# Altium PCB Arduino Micro Breakout Board_V1.0.pcbdoc
Units mil, origin at the board's own origin, x right, y up, seen from the top; angles counter-clockwise.
Board outline 3144.33 x 3144.48 mil, 2 copper layers (Top Layer, Bottom Layer); 42 components, 47 nets, 174 pads, 40 vias.
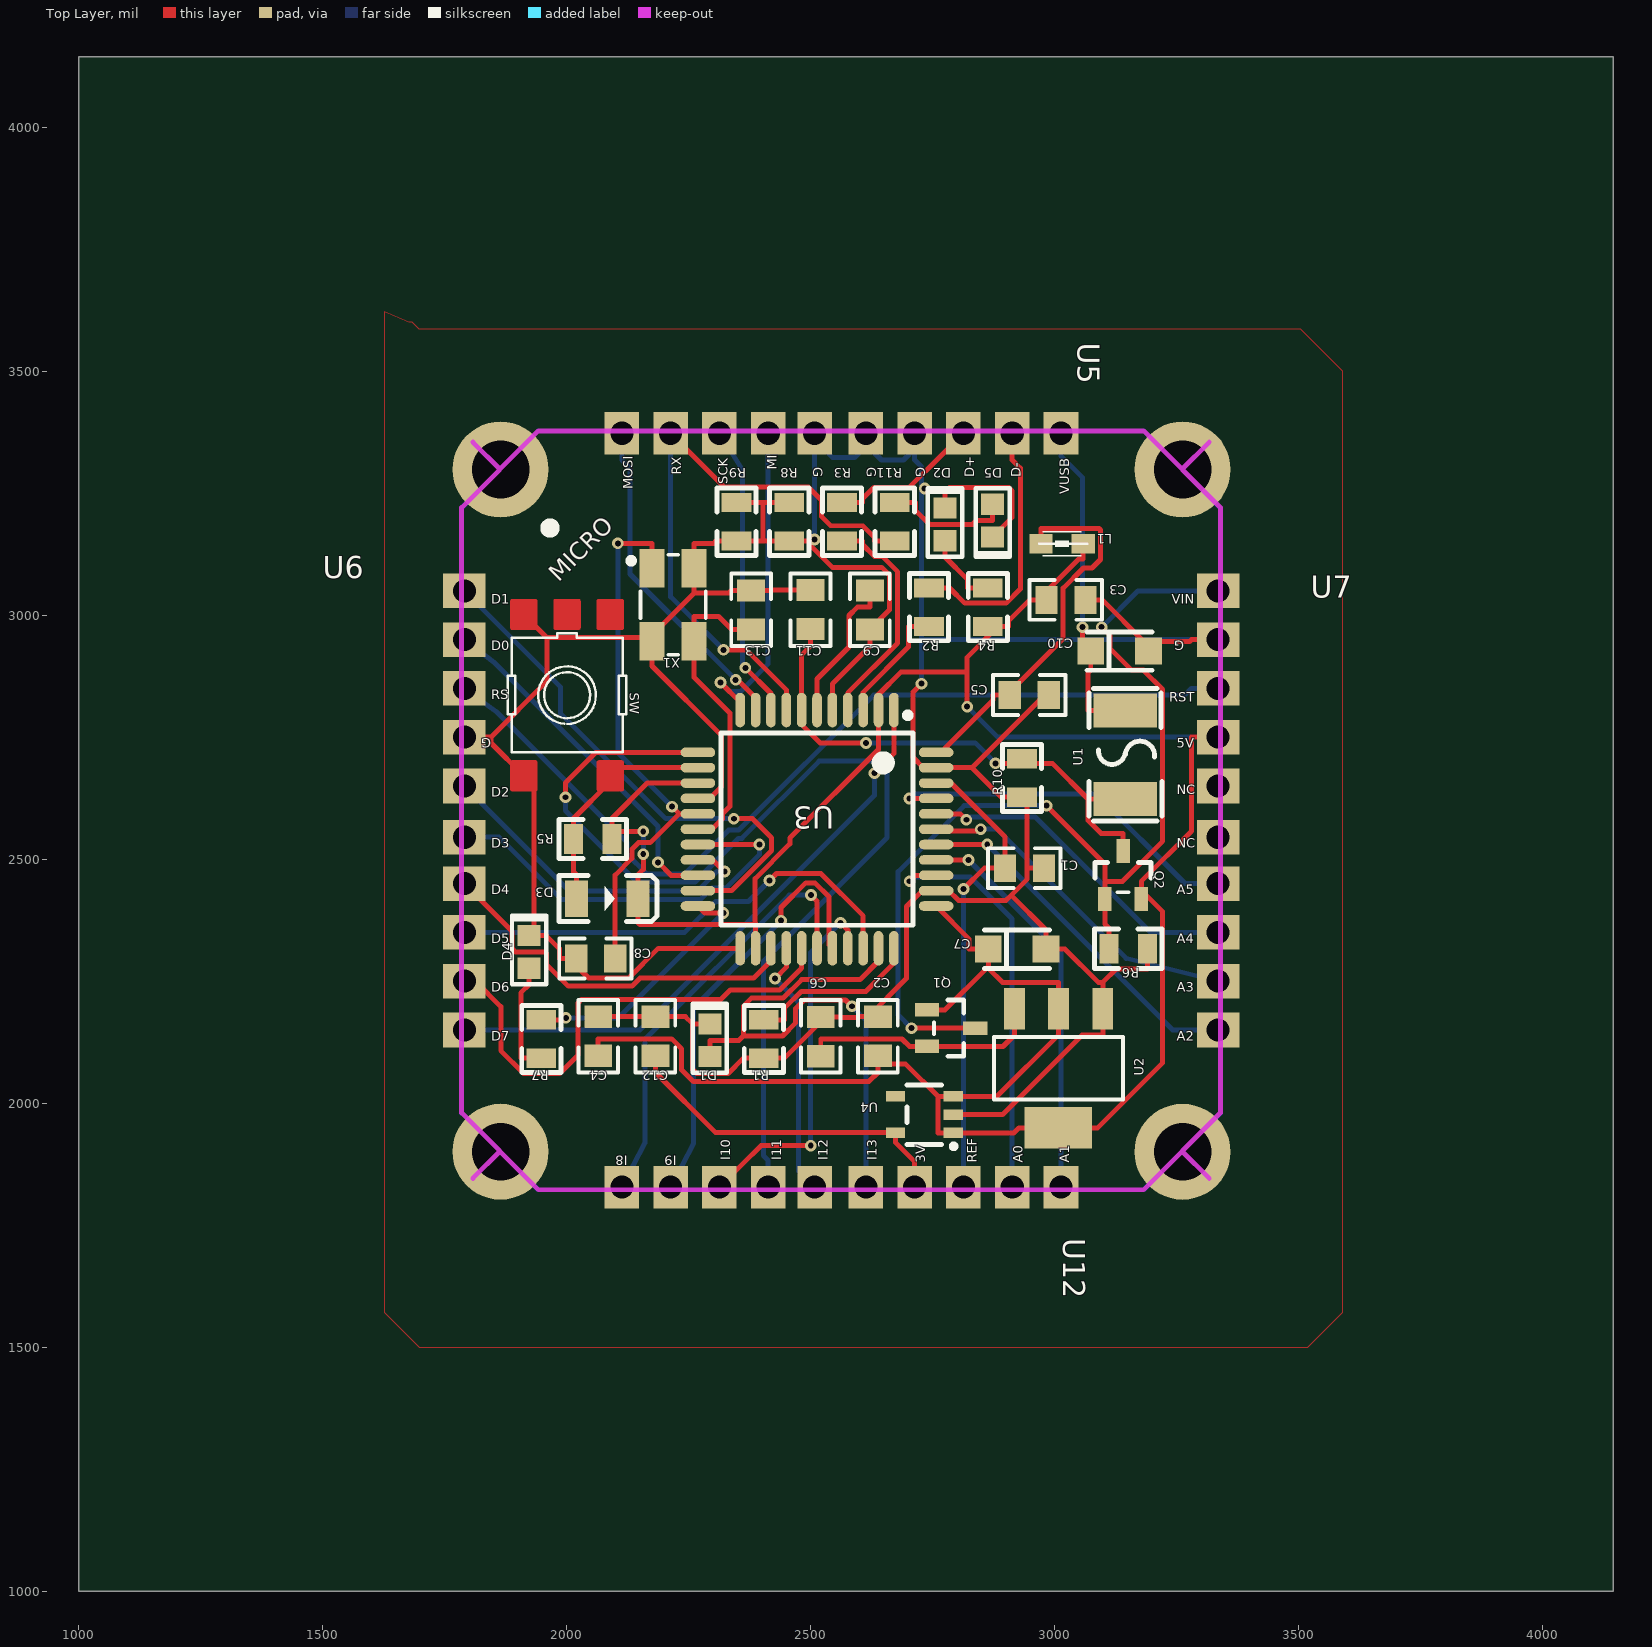
[diagram p0: Top Layer view]
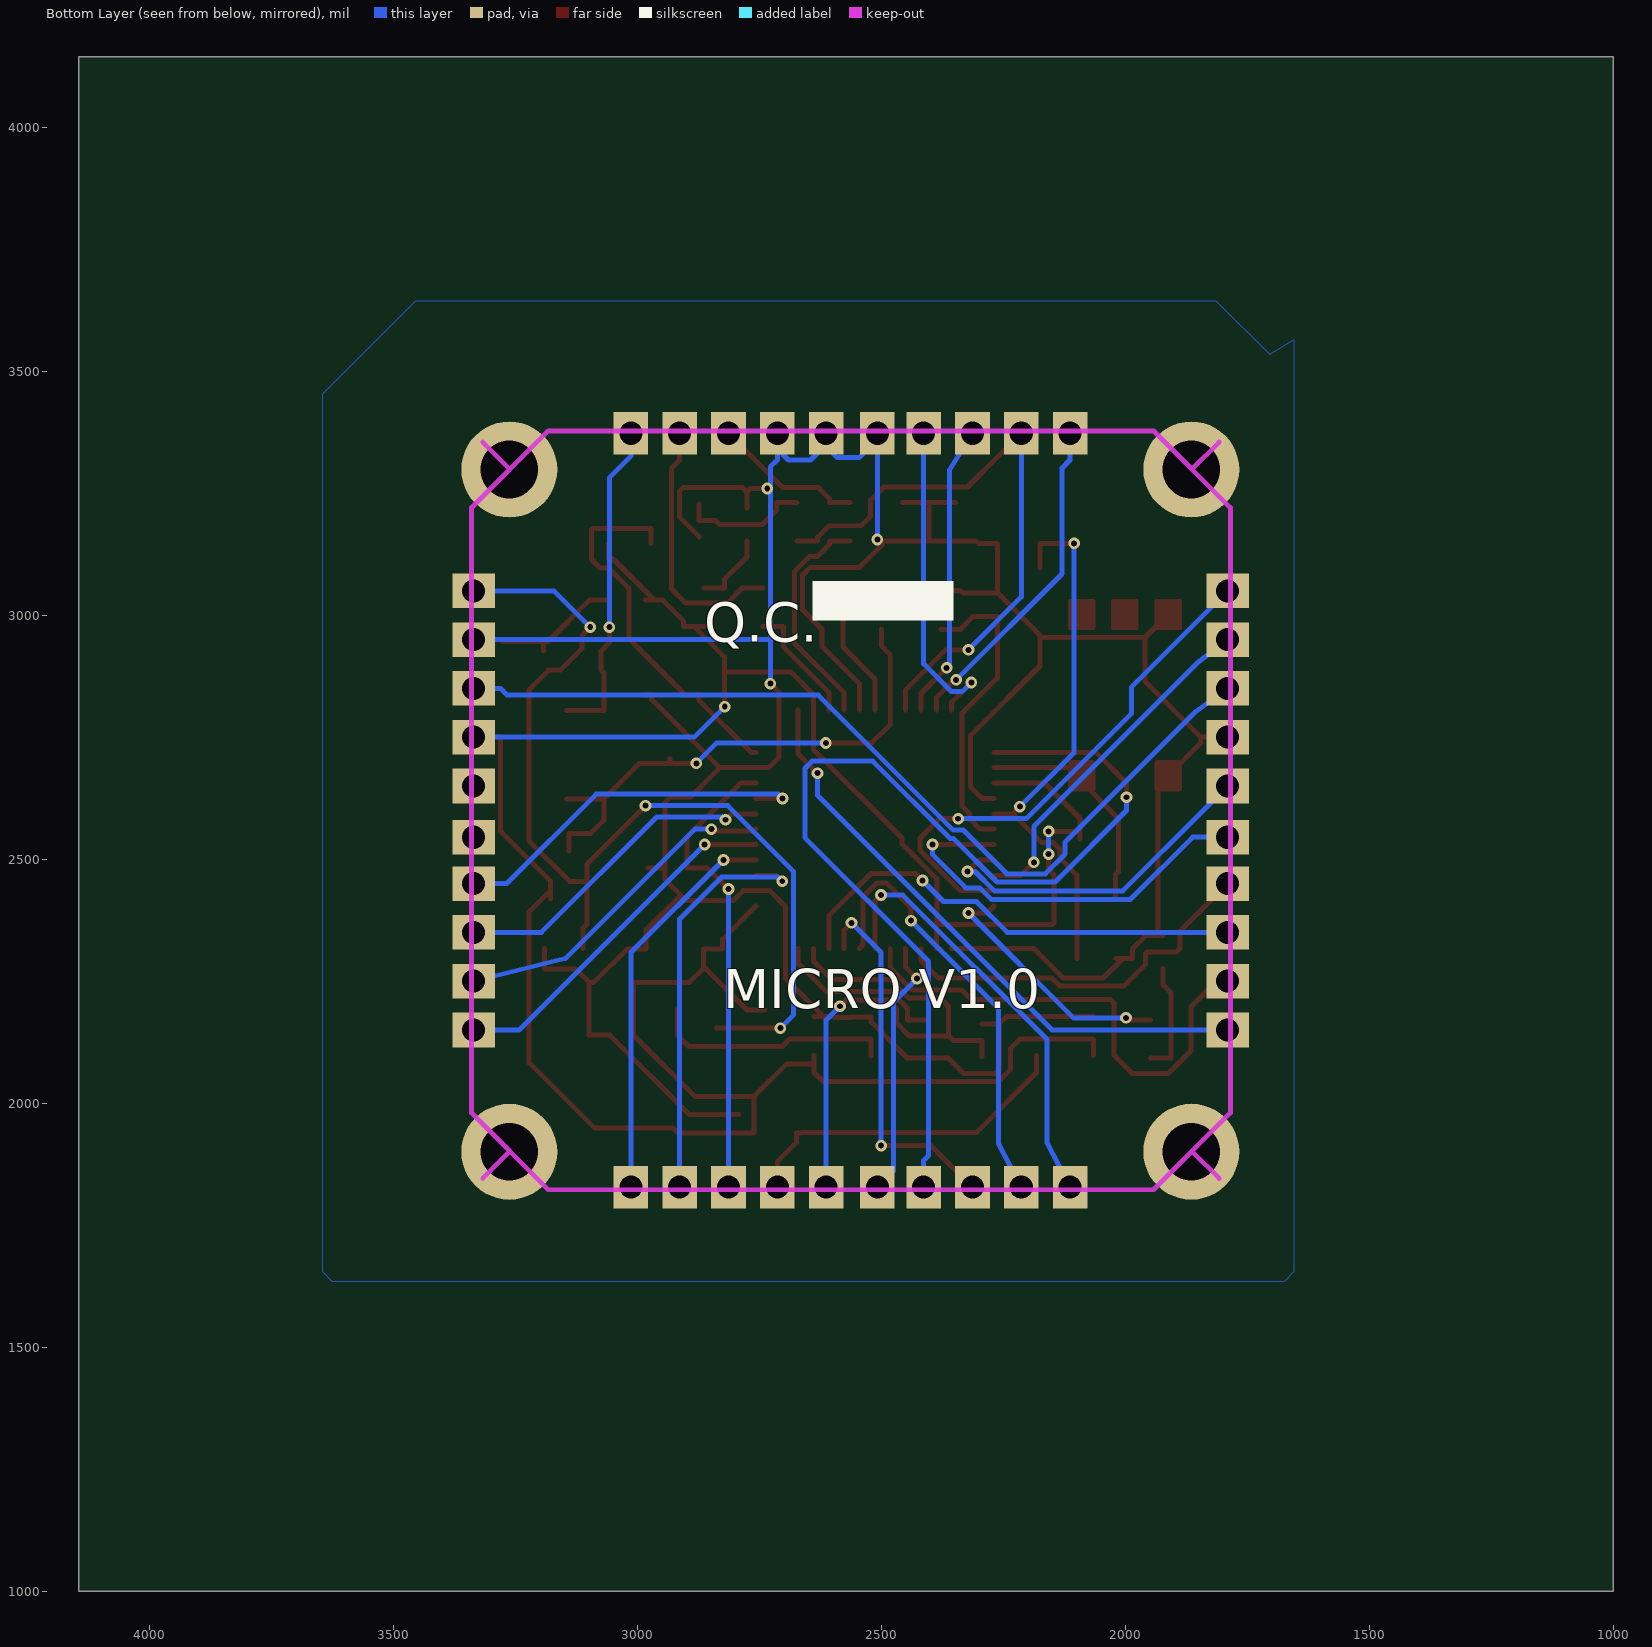
[diagram p1: Bottom Layer view, seen from below]

## Layer stack, top to bottom
Top Layer: signal copper (thickness not stored)
Dielectric: dielectric 12.6, FR-4, Dk 4.8
Bottom Layer: signal copper (thickness not stored)

## Board outline
4144.33,1000 1000,1000 1000,4144.48 4144.33,4144.48

## Components (designator, comment, footprint, x,y, rotation, side; value= is the part's Value field where it differs from the comment)
C1 "100nF" 0805#1 2937.9,2481.63 r0 top
C2 "100nF" 0805#1 2520.48,2136.55 r270 top
C3 "100nF" 0805#1 3022.9,3031.63 r0 top
C4 "100nF" 0805#1 2064.49,2137.43 r90 top
C5 "1uF" 0805#1 2947.9,2836.63 r0 top
C6 "100nF" 0805#1 2637.68,2137.43 r90 top
C7 "22uF" CAP-SMD_L3.2-W1.6-R-RD 2922.9,2315.85 r180 top
C8 "22pF" 0805#1 2059.18,2296.63 r0 top
C9 "1uF" 0805#1 2621.29,3010.83 r270 top
C10 "1uF" CAP-SMD_L3.2-W1.6-R-RD 3132.9,2926.63 r180 top
C11 "100nF" 0805#1 2499.61,3011.72 r90 top
C12 "1uF" 0805#1 2181.66,2137.43 r90 top
C13 "22pF" 0805#1 2377.9,3010.83 r270 top
D1 "Green LED" "LED 0603" 2293.08,2095.74 r90 top
D2 "Blue LED" "LED 0603" 2775.12,3152.53 r90 top
D3 "CD1206-S01575" D1206-RD 2082.9,2419.44 r180 top
D4 "Yellow LED" "LED 0603" 1922.9,2276.63 r90 top
D5 "Yellow LED" "LED 0603" 2872.9,3227.53 r270 top
L1 "MH2029-300Y" 0805#2 3015.13,3146.63 r180 top
Q1 "PMV48XP,215" SOT-23-3_L2.9-W1.6-P1.90-LS2.8-BR 2787.9,2153.76 r180 top
Q2 "FDN340P" SOT-23-3_L2.9-W1.6-P1.90-LS2.8-BR 3139.97,2467.66 r270 top
R1 "10K" R0805 2403.91,2131.63 r90 top
R2 "22" R0805 2742.4,3016.63 r90 top
R3 "22" R0805 2564.09,3191.63 r90 top
R4 "1K" R0805 2862.9,3016.63 r270 top
R5 "10K" R0805 2053.38,2541.63 r0 top
R6 "10K" R0805 3150.62,2316.63 r180 top
R7 "1K" R0805 1947.9,2131.63 r90 top
R8 "22R" R0805 2455.99,3191.63 r90 top
R9 "22R" R0805 2347.9,3191.63 r270 top
R10 "10K" R0805 2932.9,2666.63 r90 top
R11 "1K" R0805 2672.18,3191.63 r270 top
SW "TS42" TS42 2089.2,3001.63 r270 top
U1 "MF-MSMF050-2" F1812 3144.72,2714.37 r90 top
U2 "NCP1117LPST50T3G" SOT-223_L6.5-W3.5-P2.30-LS7.0-BR 3007.9,2071.63 r90 top
U3 "ATMEGA32U4-AU" QFP-44_L10.0-W10.0-P0.80-LS13.2-BL 2512.9,2561.63 r180 top
U4 "LP2985-33DBVR" SOT-23-5_L3.0-W1.7-P0.95-LS2.8-BL 2732.9,1976.63 r90 top
U5 "1*10 HEADER PIN-A" "1*10 HEADER PIN-A" 3012.91,3373.03 r270 top
U6 "1*10 HEADER PIN-A" "1*10 HEADER PIN-A" 1790,3050.12 r0 top
U7 "1*10 HEADER PIN-A" "1*10 HEADER PIN-A" 3335,3050.12 r0 top
U12 "1*10 HEADER PIN-A" "1*10 HEADER PIN-A" 3012.91,1828.03 r270 top
X1 "X503216MSD4SC" OSC-SMD_4P-L5.0-W3.2-BL 2217.9,3021.63 r270 top

## Footprints (in the part's own frame and the unit in brackets; to place one, negate y for a bottom-side part, rotate by r counter-clockwise, add the part's x,y. Pads: shape width x height; smd on the part's side, far side on the other; paste and mask are expansions set on the pad)
"1*10 HEADER PIN-A" [mm]
  rect 2.2x1.8 hole 1.2: 1(0,0) 2(0,-2.54) 3(0,-5.08) 4(0,-7.62) 5(0,-10.16) 6(0,-12.827) 7(0,-15.24) 8(0,-17.78) 9(0,-20.32) 10(0,-22.86)
0805#1 [mm]
  rect 1.16x1.45 smd: 1(-1.016,0) 2(1.016,0)
  silkscreen extent -1.9,-1.03 1.87,1.04
0805#2 [mm]
  rect 1.2x1 smd: 1(-1.1,0) 2(1.1,0)
  silkscreen extent -1.3,-0.63 1.2,0.63
CAP-SMD_L3.2-W1.6-R-RD [mm]
  rect 1.4x1.4 smd: 1(1.5,0) 2(-1.5,0)
  silkscreen extent -1.7,-1 1.7,1
D1206-RD [mm]
  rect 1.2x1.9 smd: 1(-1.6,0) 2(1.6,0)
  silkscreen extent -2.6,-1.2 2.5,1.2
F1812 [mm]
  rect 1.78x3.3 smd: 1(-2.305,0) 2(2.305,0)
  silkscreen extent -3.45,-1.9 3.45,1.9
"LED 0603" [mil]
  rect 43.35x47.2 smd: A(0.03,0)
  rect 43.25x47.2 smd: K(66.88,0)
  silkscreen extent -33,-35 108,35
OSC-SMD_4P-L5.0-W3.2-BL [mm]
  rect 2x1.3 smd: 1(-1.9,-1.1) 2(1.9,-1.1) 3(1.9,1.1) 4(-1.9,1.1)
  silkscreen extent -2.6,-2.33 2.6,1.7
QFP-44_L10.0-W10.0-P0.80-LS13.2-BL [mm]
  oval 0.5x1.8 smd: 1(-4,-6.2) 2(-3.2,-6.2) 3(-2.4,-6.2) 4(-1.6,-6.2) 5(-0.8,-6.2) 6(0,-6.2) 7(0.8,-6.2) 8(1.6,-6.2) 9(2.4,-6.2) 10(3.2,-6.2) 11(4,-6.2) 23(4,6.2) 24(3.2,6.2) 25(2.4,6.2) 26(1.6,6.2) 27(0.8,6.2) 28(0,6.2) 29(-0.8,6.2) 30(-1.6,6.2) 31(-2.4,6.2) 32(-3.2,6.2) 33(-4,6.2)
  oval 1.8x0.5 smd: 12(6.2,-4) 13(6.2,-3.2) 14(6.2,-2.4) 15(6.2,-1.6) 16(6.2,-0.8) 17(6.2,0) 18(6.2,0.8) 19(6.2,1.6) 20(6.2,2.4) 21(6.2,3.2) 22(6.2,4) 34(-6.2,4) 35(-6.2,3.2) 36(-6.2,2.4) 37(-6.2,1.6) 38(-6.2,0.8) 39(-6.2,0) 40(-6.2,-0.8) 41(-6.2,-1.6) 42(-6.2,-2.4) 43(-6.2,-3.2) 44(-6.2,-4)
  silkscreen extent -5,-6.08 5,5
R0805 [mm]
  rect 1x1.55 smd: 1(-1,0) 2(1,0)
  silkscreen extent -1.75,-1.02 1.75,1.02
SOT-23-3_L2.9-W1.6-P1.90-LS2.8-BR [mm]
  rect 1.25x0.7 smd: 1(1.25,-0.95) 2(1.25,0.95) 3(-1.25,0)
  silkscreen extent -0.65,-1.46 0.9,1.46
SOT-23-5_L3.0-W1.7-P0.95-LS2.8-BL [mm]
  rect 0.55x1 smd: 1(-0.95,-1.5) 2(0,-1.5) 3(0.95,-1.5) 4(0.95,1.5) 5(-0.95,1.5)
  silkscreen extent -1.78,-1.65 1.55,0.9
SOT-223_L6.5-W3.5-P2.30-LS7.0-BR [mil]
  rect 85x43 smd: 1(122,-90.5) 2(122,0.5) 3(122,90.5)
  rect 85x138 smd: 4(-122,0.5)
  silkscreen extent -64,-132 64,132
TS42 [mil]
  round 0 smd: 1(0,0) 2(330.71,0) 3(0,-177.17) 4(330.71,-177.17) 5(0,-88.58)
  Top Layer region: -31.5,23.43 -31.47,23.92 -31.38,24.41 -31.23,24.89 -31.02,25.35 -30.76,25.77 -30.46,26.17 -30.1,26.52 -29.71,26.83 -29.28,27.09 -28.83,27.29 -28.35,27.44 -27.86,27.53 -27.36,27.56 27.36,27.56 27.86,27.53 28.35,27.44 28.83,27.29 29.28,27.09 29.71,26.83 30.1,26.52 30.46,26.17 30.76,25.77 31.02,25.35 31.23,24.89 31.38,24.41 31.47,23.92 31.5,23.43 31.5,-23.43 31.47,-23.92 31.38,-24.41 31.23,-24.89 31.02,-25.35 30.76,-25.77 30.46,-26.17 30.1,-26.52 29.71,-26.83 29.28,-27.09 28.83,-27.29 28.35,-27.44 27.86,-27.53 27.36,-27.56 -27.36,-27.56 -27.86,-27.53 -28.35,-27.44 -28.83,-27.29 -29.28,-27.09 -29.71,-26.83 -30.1,-26.52 -30.46,-26.17 -30.76,-25.77 -31.02,-25.35 -31.23,-24.89 -31.38,-24.41 -31.47,-23.92 -31.5,-23.43
  Top Layer region: 299.21,23.43 299.24,23.92 299.33,24.41 299.48,24.89 299.69,25.35 299.94,25.77 300.25,26.17 300.6,26.52 301,26.83 301.42,27.09 301.88,27.29 302.36,27.44 302.85,27.53 303.35,27.56 358.07,27.56 358.57,27.53 359.06,27.44 359.54,27.29 359.99,27.09 360.42,26.83 360.81,26.52 361.16,26.17 361.47,25.77 361.73,25.35 361.94,24.89 362.08,24.41 362.17,23.92 362.2,23.43 362.2,-23.43 362.17,-23.92 362.08,-24.41 361.94,-24.89 361.73,-25.35 361.47,-25.77 361.16,-26.17 360.81,-26.52 360.42,-26.83 359.99,-27.09 359.54,-27.29 359.06,-27.44 358.57,-27.53 358.07,-27.56 303.35,-27.56 302.85,-27.53 302.36,-27.44 301.88,-27.29 301.42,-27.09 301,-26.83 300.6,-26.52 300.25,-26.17 299.94,-25.77 299.69,-25.35 299.48,-24.89 299.33,-24.41 299.24,-23.92 299.21,-23.43
  Top Layer region: -31.5,-153.74 -31.47,-153.24 -31.38,-152.75 -31.23,-152.27 -31.02,-151.82 -30.76,-151.39 -30.46,-151 -30.1,-150.65 -29.71,-150.34 -29.28,-150.08 -28.83,-149.87 -28.35,-149.73 -27.86,-149.64 -27.36,-149.61 27.36,-149.61 27.86,-149.64 28.35,-149.73 28.83,-149.87 29.28,-150.08 29.71,-150.34 30.1,-150.65 30.46,-151 30.76,-151.39 31.02,-151.82 31.23,-152.27 31.38,-152.75 31.47,-153.24 31.5,-153.74 31.5,-200.59 31.47,-201.09 31.38,-201.58 31.23,-202.06 31.02,-202.51 30.76,-202.94 30.46,-203.33 30.1,-203.68 29.71,-203.99 29.28,-204.25 28.83,-204.46 28.35,-204.6 27.86,-204.69 27.36,-204.72 -27.36,-204.72 -27.86,-204.69 -28.35,-204.6 -28.83,-204.46 -29.28,-204.25 -29.71,-203.99 -30.1,-203.68 -30.46,-203.33 -30.76,-202.94 -31.02,-202.51 -31.23,-202.06 -31.38,-201.58 -31.47,-201.09 -31.5,-200.59
  Top Layer region: 299.21,-153.74 299.24,-153.24 299.33,-152.75 299.48,-152.27 299.69,-151.82 299.94,-151.39 300.25,-151 300.6,-150.65 301,-150.34 301.42,-150.08 301.88,-149.87 302.36,-149.73 302.85,-149.64 303.35,-149.61 358.07,-149.61 358.57,-149.64 359.06,-149.73 359.54,-149.87 359.99,-150.08 360.42,-150.34 360.81,-150.65 361.16,-151 361.47,-151.39 361.73,-151.82 361.94,-152.27 362.08,-152.75 362.17,-153.24 362.2,-153.74 362.2,-200.59 362.17,-201.09 362.08,-201.58 361.94,-202.06 361.73,-202.51 361.47,-202.94 361.16,-203.33 360.81,-203.68 360.42,-203.99 359.99,-204.25 359.54,-204.46 359.06,-204.6 358.57,-204.69 358.07,-204.72 303.35,-204.72 302.85,-204.69 302.36,-204.6 301.88,-204.46 301.42,-204.25 301,-203.99 300.6,-203.68 300.25,-203.33 299.94,-202.94 299.69,-202.51 299.48,-202.06 299.33,-201.58 299.24,-201.09 299.21,-200.59
  Top Layer region: -31.5,-65.16 -31.47,-64.66 -31.38,-64.17 -31.23,-63.69 -31.02,-63.24 -30.76,-62.81 -30.46,-62.42 -30.1,-62.06 -29.71,-61.76 -29.28,-61.5 -28.83,-61.29 -28.35,-61.14 -27.86,-61.05 -27.36,-61.02 27.36,-61.02 27.86,-61.05 28.35,-61.14 28.83,-61.29 29.28,-61.5 29.71,-61.76 30.1,-62.06 30.46,-62.42 30.76,-62.81 31.02,-63.24 31.23,-63.69 31.38,-64.17 31.47,-64.66 31.5,-65.16 31.5,-112.01 31.47,-112.51 31.38,-113 31.23,-113.47 31.02,-113.93 30.76,-114.36 30.46,-114.75 30.1,-115.1 29.71,-115.41 29.28,-115.67 28.83,-115.87 28.35,-116.02 27.86,-116.11 27.36,-116.14 -27.36,-116.14 -27.86,-116.11 -28.35,-116.02 -28.83,-115.87 -29.28,-115.67 -29.71,-115.41 -30.1,-115.1 -30.46,-114.75 -30.76,-114.36 -31.02,-113.93 -31.23,-113.47 -31.38,-113 -31.47,-112.51 -31.5,-112.01
  silkscreen extent 38,-210 283,33

## Free pads (board coordinates)
  round 196.85 hole 118.11: 1(1864.4,3298.82) 1(1864.4,1900.79) 1(3262.03,1900.41) 1(3262.03,3298.82)

## Via types
v1: diameter 24.02, hole 12.2, Top Layer to Bottom Layer, 40 vias

## Nets (pads, with @x,y where several pads share a name; then routed paths per layer and width w, separated by ;. In a path a pad name is that pad's centre, name@x,y a point inside that pad or via, vN(x,y) a via of type N, cw(c..) or ccw(c..) an arc to the next point about the centre after c; other vN are vias at no path point)
3V3: C12.1 U4.5 U12.4 | length 705.1
  Top Layer w10: U4.5 2673.84,1919.19 2712.91,1880.12 U12.4
  Top Layer w10.24: C12.1 2181.7,2063.13 2304.3,1940.43 2664.7,1940.43 2666,1939.23 U4.5
+5V: C3.1 C4.1 C6.1 C7.1 D3.1 L1.1 Q1.1 Q2.2 R4.2 R5.2 U2.2 U2.4 U3.2 U3.14 U3.24 U3.34 U4.1 U4.3 U7.4 | length 5786.1
  Top Layer w10.24: C4.1 2064.5,2131.83 2215.1,2131.83 2235.3,2111.53 2235.3,2068.43 2259.3,2044.43 2619,2044.43 2637.7,2063.13 C6.1@2637.7,2080.23 ; R5.2 R5.2@2092.7,2557.33 ; v1(2156.8,2510.33) 2156.8,2479.33 2145.9,2468.33 D3.1 2145.9,2370.53 2150.1,2366.33 2381.8,2366.33 2386,2370.53 ; v1(2156.8,2557.33) R5.2@2092.7,2557.33 ; U3.14 2165.2,2656.13 2092.7,2583.63 2092.7,2562.63 R5.2@2092.7,2557.33 ; U3.24 2386.9,2369.63 2386,2370.53 ; C6.1 C6.1@2637.7,2080.23 ; Q1.1@2738.7,2191.13 2774.8,2191.13 2860.4,2276.83 2863.8,2276.83 ; U3.34@2757,2404.13 2824.8,2336.33 2824.8,2315.83 C7.1 2863.8,2296.33 2863.8,2276.83 ; v1(2820.6,2812.73) 2820.6,2812.83 2820.6,2883.33 ; R4.2@2862.9,2977.23 R4.2@2883.9,2977.23 ; C3.1 C3.1@2965.7,3031.63 ; L1.1 3058.4,3115.43 3049.5,3115.43 C3.1@2965.7,3031.63 ; Q2.2@3177.4,2418.43 Q2.2@3177.4,2436.53 ; U7.4 3280.2,2750.13 3280.2,2557.43 3177.4,2454.63 Q2.2@3177.4,2436.53 ; 2386,2370.53 2386,2460.33 2457.3,2531.63 2457.3,2543.43 2638.9,2725.03 U3.2 2638.9,2837.63 2684.6,2883.33 2820.6,2883.33 ; C6.1@2637.7,2080.23 2694.5,2080.23 2760.7,2014.03 ; 2760.7,2014.03 2760.7,1939.23 2791.7,1939.23 2791.9,1939.23 2916.5,1939.23 2926.9,1949.63 U2.4 3087.9,1949.63 3221.2,2082.93 3221.2,2392.73 Q2.2@3177.4,2436.53 ; 2760.7,2014.03 2791.9,2014.03 2881.8,2014.03 3007.4,2139.63 3007.4,2166.63 U2.2 3007.4,2247.63 2893,2247.63 2863.8,2276.83 ; 2820.6,2883.33 2820.6,2913.93 R4.2@2883.9,2977.23 ; R4.2@2883.9,2977.23 2904.9,2977.23 2904.9,2988.03 2948.5,3031.63 C3.1@2965.7,3031.63
  Bottom Layer w10.24: v1(2156.8,2510.33) v1(2156.8,2557.33) ; v1(2820.6,2812.73) 2883.3,2750.13 U7.4
A0: U3.36 U12.2 | length 858.2
  Top Layer w10.24: v1(2702.7,2454.93) 2714.9,2467.13 U3.36
  Bottom Layer w10.24: v1(2702.7,2454.93) 2711.3,2463.53 2826.9,2463.53 2912.9,2377.53 U12.2
A1: U3.37 U12.1 | length 815.3
  Top Layer w10.24: U3.37 v1(2823.1,2498.63)
  Bottom Layer w10.24: v1(2823.1,2498.63) 3012.9,2308.83 U12.1
A2: U3.38 U7.10 | length 735.4
  Top Layer w10.24: U3.38 v1(2861.7,2530.13)
  Bottom Layer w10.24: v1(2861.7,2530.13) 3241.7,2150.13 U7.10
A3: U3.39 U7.9 | length 696.9
  Top Layer w10.24: U3.39 2761.2,2557.43 2843.9,2557.43 v1(2848.1,2561.63)
  Bottom Layer w10.24: v1(2848.1,2561.63) 2882,2561.63 3146.5,2297.03 U7.9
A4: U3.40 U7.8 | length 683.7
  Top Layer w10.24: U3.40 2806.6,2593.13 v1(2818.8,2580.93)
  Bottom Layer w10.24: v1(2818.8,2580.93) 2824.9,2587.03 2959.4,2587.03 3196.3,2350.13 U7.8
A5: U3.41 U7.7 | length 767.3
  Top Layer w10.24: v1(2702.1,2624.63) U3.41
  Bottom Layer w10.24: v1(2702.1,2624.63) 2710.8,2633.33 3083.9,2633.33 3267.1,2450.13 U7.7
AREF: C1.1 U3.42 U12.3 | length 964.3
  Top Layer w10.24: U3.42 2787.6,2656.13 2897.9,2545.83 C1.1 2863.6,2481.63 2855.7,2481.63 v1(2812.9,2438.93)
  Bottom Layer w10.24: U12.3 v1(2812.9,2438.93)
C2_2: C2.2 Q1.2 U2.3 | length 501.7
  Top Layer w10.24: C2.2 2520.5,2130.93 2521.5,2131.83 2687.1,2131.83 2702.6,2116.33 2738.7,2116.33 2894.1,2116.33 2917.4,2139.63 U2.3
C5_1: C5.1 L1.2 U3.44 | length 788.1
  Top Layer w10.24: U3.44 2766.8,2719.13 2873.6,2825.93 2873.6,2836.63 2890.7,2836.63 2895,2836.63 C5.1@2901.4,2836.63 ; C5.1 C5.1@2901.4,2836.63 ; L1.2 2971.8,3177.83 3090.6,3177.83 3093.6,3174.83 3093.6,3114.43 3076.2,3097.03 3058.8,3097.03 3017.2,3055.53 3017.2,2952.43 C5.1@2901.4,2836.63
C9_1: C9.1 U3.6 | length 305.1
  Top Layer w10.24: U3.6 2512.9,2869.33 2578.4,2934.83 2578.4,2999.43 2595.5,3016.53 2621.3,3016.53 C9.1
C10_1: C10.1 U1.2 U5.1 | length 671.9
  Top Layer w10.24: v1(3057.1,2975.53) 3057.1,2943.43 C10.1 3073.8,2907.13 3073.8,2887.53 3068.2,2881.93 3068.2,2805.13 U1.2
  Bottom Layer w10.24: U5.1 3012.9,3326.13 3057.1,3281.93 v1(3057.1,2975.53)
D0/RX: U3.20 U6.2 | length 718.4
  Top Layer w10.24: v1(2187.2,2493.63) 2213.7,2467.13 U3.20
  Bottom Layer w10.24: U6.2 1851.2,2903.13 2187.2,2567.13 v1(2187.2,2493.63)
D1/TX: U3.21 U6.1 | length 1082.5
  Top Layer w10.24: U3.21@2268.8,2435.63 2337.7,2435.63 2420,2517.83 2420,2543.53 2380.5,2583.03 v1(2342.3,2583.03)
  Bottom Layer w10.24: U6.1 1836.9,3003.13 1986.8,2853.33 1986.8,2799.13 2202.9,2583.03 v1(2342.3,2583.03)
D2/SDA: U3.19 U6.5 | length 702.5
  Top Layer w10.24: U3.19 2299.2,2498.63 v1(2323.1,2474.73)
  Bottom Layer w10.24: U6.5 1836.9,2603.13 2004.7,2435.43 2268.2,2435.43 2307.6,2474.73 v1(2323.1,2474.73)
D3/SCL: U3.18 U6.6 | length 841.9
  Top Layer w10.24: U3.18 v1(2394.6,2530.13)
  Bottom Layer w10.24: U6.6 1861.6,2545.13 1988.9,2417.83 2274.3,2417.83 2297.7,2441.33 2326.7,2441.33 2394.6,2509.23 v1(2394.6,2530.13)
D4: U3.25 U6.7 | length 795.9
  Top Layer w10.24: U6.7 1836.9,2403.13 1887.8,2352.33 1887.8,2317.13 1894.5,2310.33 1954.5,2310.33 1958,2306.83 1958,2285.13 2003.2,2239.93 2133.7,2239.93 2150.3,2256.63 2382.9,2256.63 2418.4,2292.13 U3.25
D5: U3.31 U6.8 | length 969.7
  Top Layer w10.24: v1(2415.4,2456.53) 2429.7,2470.73 2520.7,2470.73 2607.4,2384.03 U3.31
  Bottom Layer w10.24: U6.8 2241.8,2350.13 2305.1,2413.33 2372.3,2413.33 v1(2415.4,2456.53)
D6: U3.27 U6.9 | length 1015.3
  Top Layer w10.24: U6.9 1812.9,2250.13 1865,2198.03 1865,2107.84 1911.8,2061.03 1985.6,2061.03 2023,2098.43 2023,2205.53 2030.3,2212.83 2316.1,2212.83 2335.2,2231.93 2436.3,2231.93 2481.4,2277.03 U3.27
D7: U3.1 U6.10 | length 1230.9
  Top Layer w10.24: v1(2630.5,2676.43) 2670.4,2716.33 U3.1
  Bottom Layer w10.24: U6.10 2149.6,2150.13 2630.5,2631.03 v1(2630.5,2676.43)
GND: C1.2 C2.1 C3.2 C4.2 C5.2 C6.2 C7.2 C8.1 C9.2 C10.2 C11.2 C12.2 C13.1 D1.K D2.K D4.K D5.K R1.1 R6.1 R8.1 R8.2 R9.1 R9.2 R10.1 SW.3 SW.4 U2.1 U3.5 U3.15 U3.23 U3.35 U3.43 U4.2 U5.4 U5.5 U5.6 U6.4 U7.2 X1.2 X1.4 | length 8833.8
  Top Layer w10.24: U6.4 1844.8,2750.13 ; SW.3 1959.2,2954.53 ; D4.K D4.K@1933.1,2343.53 ; C8.1 C8.1@2004.6,2296.63 ; C4.2 C12.2 2243.1,2177.43 2258,2162.63 ; U3.15 2293.1,2624.63 2317.4,2648.93 2317.4,2753.13 2174.6,2895.93 X1.2 X1.2@2174.6,2954.53 ; D1.K 2275.5,2162.63 2258,2162.63 ; R9.1 2401.9,3231.03 ; U3.23 2187.7,2317.53 2126.8,2256.63 2044.6,2256.63 C8.1@2004.6,2296.63 ; R8.2 2401.9,3231.03 ; C11.2 2418.8,3051.73 2417.9,3050.83 2397.9,3050.83 C13.1 2337.8,3050.83 2332.6,3045.53 2261.2,3045.53 ; v1(2507.9,3155.43) 2501.2,3155.43 v1@2498,3152.23 ; U3.5 2544.4,2859.63 2621.3,2936.53 C9.2 2661.4,3011.03 2661.4,3082.23 2645.4,3098.23 2544.3,3098.23 2498,3144.43 v1@2498,3152.23 ; C6.2 C6.2@2617.6,2177.43 ; v1(2727.1,2859.83) 2709.6,2842.33 2709.6,2708.53 2730.6,2687.63 U3.43 2830.5,2687.63 ; v1(2733.5,3259.73) 2768,3259.73 2775.1,3252.53 ; D2.K 2775.1,3252.53 ; U4.2@2791.9,1976.63 2892.9,1976.63 3055.9,2139.63 3098.4,2139.63 U2.1 3098.4,2247.63 ; D5.K@2872.9,3160.63 2912.9,3200.63 2912.9,3254.73 2906.4,3261.33 2783.9,3261.33 2775.1,3252.53 ; R10.1@2932.9,2627.23 R10.1@2932.3,2627.23 ; C1.2 2943.5,2481.63 ; C5.2 2970.7,2836.63 2970.7,2827.83 2830.5,2687.63 ; C3.2 3097.2,3031.63 3182.7,2946.13 C10.2@3192,2946.13 ; R6.1 3190,2295.63 3190,2274.63 3125.4,2274.63 3098.4,2247.63 ; C10.2 C10.2@3192,2946.13 ; U7.2 3280.2,2950.13 3276.2,2946.13 C10.2@3192,2946.13 ; 1844.8,2750.13 1844.8,2738.13 SW.4 1933.1,2649.83 D4.K@1933.1,2343.53 ; 1844.8,2750.13 1959.2,2864.53 1959.2,2954.53 ; D4.K@1933.1,2343.53 1958,2343.53 1984.8,2316.73 1984.8,2296.63 C8.1@2004.6,2296.63 ; 1959.2,2954.53 X1.2@2174.6,2954.53 ; X1.2@2174.6,2954.53 2174.6,2958.93 2261.2,3045.53 ; 2258,2162.63 2258,2069.33 2266.2,2061.03 2330.7,2061.03 2361.9,2092.23 2403.9,2092.23 2406.3,2092.23 2445.9,2092.23 2520.5,2166.83 C2.1 2560.5,2176.53 2561.9,2175.23 2595.4,2175.23 2597.6,2177.43 C6.2@2617.6,2177.43 ; 2261.2,3045.53 X1.4 2261.2,3147.33 2300.9,3147.33 2305.9,3152.23 2347.9,3152.23 2401.9,3152.23 ; 2401.9,3152.23 2456,3152.23 v1@2498,3152.23 ; 2401.9,3152.23 2401.9,3231.03 ; C6.2@2617.6,2177.43 2696.1,2255.93 2696.1,2403.23 2728.5,2435.63 2757,2435.63 2782.9,2435.63 2803.2,2415.33 2899.9,2415.33 2910.7,2426.13 ; 2830.5,2687.63 2890.9,2627.23 2928.4,2627.23 R10.1@2932.3,2627.23 ; 2910.7,2426.13 2943.5,2459.03 2943.5,2481.63 ; 2910.7,2426.13 2982,2354.93 C7.2 3001.5,2315.83 3021,2315.83 3089.2,2247.63 3098.4,2247.63 ; R10.1@2932.3,2627.23 2943.5,2616.03 2943.5,2481.63
  Bottom Layer w10.24: v1(2507.9,3155.43) U5.6 2507.91,3360.12 2545,3323.03 2590,3323.03 2612.91,3345.95 U5.5 2612.91,3350.12 2645,3318.03 2690,3318.03 2712.9,3340.93 U5.4 2712.9,3318.23 2727.1,3304.03 v1@2727.1,3259.73 ; v1(2727.1,2859.83) 2727.1,2950.13 ; v1(2733.5,3259.73) v1@2727.1,3259.73 ; U7.2 2727.1,2950.13 ; 2727.1,2950.13 v1@2727.1,3259.73
IO8: U3.28 U12.10 | length 891.5
  Top Layer w10.24: v1(2500.4,2426.53) 2512.9,2414.03 U3.28
  Bottom Layer w10.24: U12.10 2160,1918.03 2159.9,2130.73 2455.7,2426.53 v1(2500.4,2426.53)
IO9: U3.29 U12.9 | length 898.4
  Top Layer w10.24: v1(2439,2374.23) 2439,2401.03 2489.8,2451.83 2508.4,2451.83 2537.4,2422.83 2537.4,2324.53 U3.29
  Bottom Layer w10.24: U12.9 2260,1918.03 2259.9,2195.13 v1(2439,2374.23)
IO10: U3.30 U12.8 | length 762.6
  Top Layer w10.24: U12.8 2359.9,1875.03 2397.9,1913.03 v1(2500,1913.03) ; v1(2560.9,2369.73) 2575.9,2354.73 U3.30
  Bottom Layer w10.24: v1(2500,1913.03) 2500,2308.83 v1(2560.9,2369.73)
IO11: U3.12 U12.7 | length 2149.5
  Top Layer w10.24: v1(1997.2,2627.03) 1997.2,2656.33 2060,2719.13 U3.12
  Bottom Layer w10.24: v1(1997.2,2627.03) 1997.2,2599.93 2143.6,2453.43 2262.7,2453.43 2352.1,2542.83 2358.9,2542.83 2517.1,2701.03 2641.3,2701.03 2656.3,2686.03 2656.3,2544.13 2403.1,2290.93 2403.1,1892.63 2412.9,1882.83 U12.7
IO12: U3.26 U12.6 | length 532.8
  Top Layer w10.24: v1(2426.6,2255.43) 2449.9,2278.73 U3.26
  Bottom Layer w10.24: v1(2426.6,2255.43) 2474.7,2207.33 2474.7,1861.23 U12.6
IO13: D1.A U3.32 U12.5 | length 1166.2
  Top Layer w10.24: D1.A@2293.1,2095.73 2293.1,2128.93 2352.9,2128.93 2361.9,2137.93 ; v1(2584.4,2198.73) 2571.4,2211.73 2486.8,2211.73 2469.1,2194.03 2469.1,2164.73 2442.2,2137.93 2361.9,2137.93 ; U3.32 2638.9,2291.43 2600.8,2253.33 2481.3,2253.33 2443.2,2215.33 2378.4,2215.33 2361.9,2198.83 2361.9,2137.93
  Bottom Layer w10.24: v1(2584.4,2198.73) 2612.9,2170.23 U12.5
MISO: U3.11 U5.7 | length 674.6
  Top Layer w10.24: v1(2315.2,2862.13) 2355.4,2821.93 U3.11
  Bottom Layer w10.24: v1(2315.2,2862.13) 2333.9,2843.53 2356,2843.53 2412.9,2900.33 U5.7
MOSI: U3.10 U5.10 | length 682.9
  Top Layer w10.24: v1(2346.2,2867.73) 2349.8,2867.73 2386.9,2830.63 U3.10
  Bottom Layer w10.24: U5.10 2112.9,3318.23 2129.6,3301.53 2129.6,3084.43 v1(2346.2,2867.73)
R1_2: R1.2 U3.33 | length 359
  Top Layer w10.24: R1.2 2445.9,2171.03 2445.9,2194.43 2481,2229.43 2613.2,2229.43 2670.4,2286.63 U3.33
R2_2: R2.2 U5.2 | length 538.2
  Top Layer w10.24: R2.2 2784.4,3056.03 2815.6,3024.83 2900.4,3024.83 2929.6,3053.93 2929.6,3301.53 2912.9,3318.23 U5.2
R3_2: R3.2 U5.3 | length 312.2
  Top Layer w10.24: R3.2 2606.1,3231.03 2606.1,3238.83 2629.5,3262.23 2702.1,3262.23 2766,3326.13 U5.3
R4_1: D2.A R4.1 | length 157.5
  Top Layer w10.24: D2.A@2775.1,3152.53 2775.1,3119.33 2820.9,3073.63 2820.9,3056.03 R4.1
R5_1: D3.2 R5.1 SW.2 U3.13 | length 471.6
  Top Layer w10.24: D3.2 2019.9,2468.33 2014,2474.23 R5.1 2014,2583.63 2089.2,2658.83 SW.2 2105.9,2687.63 U3.13
R7_1: D4.A R7.1 | length 233.4
  Top Layer w10.24: D4.A@1922.9,2276.63 1922.9,2243.43 1905.9,2226.43 1905.9,2092.23 R7.1@1947.9,2092.23
R7_2: R7.2 U3.22 | length 521.7
  Top Layer w10.24: R7.2 1989.9,2171.03 1994.1,2171.03 v1(1998.1,2175.03) ; U3.22@2268.8,2404.13 2283.1,2389.83 v1(2320.9,2389.83)
  Bottom Layer w10.24: v1(1998.1,2175.03) 2106.1,2175.03 v1(2320.9,2389.83)
R11_1: D5.A R11.1 | length 265
  Top Layer w10.24: R11.1 2714.2,3231.03 2714.2,3215.43 2743.3,3186.23 2831.6,3186.23 2839.7,3194.33 2872.9,3194.33 D5.A
RD+: R3.1 U3.4 | length 470.1
  Top Layer w10.24: R3.1@2564.1,3152.23 2606.1,3152.23 2606.1,3144.93 2630.3,3120.73 2646.4,3120.73 2678.1,3089.13 2678.1,2943.33 2575.9,2841.13 U3.4
RD-: R2.1 U3.3 | length 252
  Top Layer w10.24: U3.3 2607.4,2842.23 2700.4,2935.23 2700.4,2977.23 R2.1@2742.4,2977.23
RESET: U6.3 U7.3 | length 1869.7
  Bottom Layer w10.24: U6.3 1854.9,2803.13 2123.4,2534.63 2123.4,2510.43 2163.7,2470.13 2242,2470.13 2331.4,2559.53 2352,2559.53 2628.8,2836.23 3266.3,2836.23 3280.2,2850.13 U7.3
RXLED/SS: R11.2 U3.8 U5.9 | length 1267.8
  Top Layer w10.24: U5.9 2259.9,3326.13 2323,3262.93 2495,3262.93 2521.6,3236.33 2521.6,3202.83 2540.9,3183.43 2606.8,3183.43 2630.2,3160.13 2630.2,3152.23 R11.2@2672.2,3152.23 ; v1(2321.2,2929.23) 2367.9,2929.23 2449.9,2847.23 U3.8
  Bottom Layer w10.24: U5.9 2212.9,3037.63 v1(2321.2,2929.23)
SCK: U3.9 U5.8 | length 605.1
  Top Layer w10.24: v1(2365.9,2892.33) 2418.4,2839.83 U3.9
  Bottom Layer w10.24: U5.8 2360,3298.03 2359.9,2898.43 v1(2365.9,2892.33)
VIN: Q1.3 Q2.1 R6.2 U7.1 | length 2095.5
  Top Layer w10.24: v1(2706.6,2153.73) Q1.3@2837.1,2153.73 ; v1(2983,2609.83) 3102.6,2490.33 3102.6,2454.63 ; v1(3096.2,2975.63) 3112.9,2958.93 3112.9,2932.13 3157.5,2887.53 3181.4,2887.53 3221.2,2847.83 3221.2,2537.13 3138.7,2454.63 3102.6,2454.63 ; R6.2@3111.2,2316.63 3111.2,2358.63 3102.6,2367.33 3102.6,2382.33 3102.6,2400.43 3102.6,2418.43 3102.6,2454.63
  Bottom Layer w10.24: v1(2706.6,2153.73) 2679.2,2181.23 2679.2,2474.53 2814.4,2609.83 v1(2983,2609.83) ; v1(3096.2,2975.63) 3170.7,3050.13 U7.1
VUSB: C11.1 Q2.3 R10.2 U1.1 U3.7 | length 1102.1
  Top Layer w10.24: C11.1 2499.6,2937.33 2481.4,2919.13 U3.7 2481.4,2775.93 2519,2738.43 v1(2613.4,2738.43) ; v1(2878.8,2696.63) R10.2@2932.9,2696.63 ; R10.2 R10.2@2932.9,2696.63 ; Q2.3@3140,2516.83 3140,2553.03 3094.9,2553.03 3068.2,2579.63 3068.2,2623.63 ; U1.1 3068.2,2623.63 ; R10.2@2932.9,2696.63 2995.2,2696.63 3068.2,2623.63
  Bottom Layer w10.24: v1(2613.4,2738.43) 2837.1,2738.43 v1(2878.8,2696.63)
X1_1: C8.2 U3.16 X1.1 | length 1130.4
  Top Layer w10.24: C8.2 2099.2,2467.53 2133.3,2501.73 2133.3,2520.03 2147.1,2533.83 2171,2533.83 2230.4,2593.13 ; v1(2104.6,3147.33) 2174.6,3147.33 X1.1 ; v1(2215.8,2607.73) 2230.4,2593.13 ; U3.16 2230.4,2593.13
  Bottom Layer w10.24: v1(2104.6,3147.33) 2104.6,2718.93 v1(2215.8,2607.73)
X1_3: C13.2 U3.17 X1.3 | length 638.1
  Top Layer w10.24: U3.17 2297.7,2561.63 2318.8,2582.73 2318.8,2592.73 2334.1,2608.03 2334.1,2799.53 2261.2,2872.43 2261.2,2895.93 X1.3 2261.2,2972.23 2261.2,2997.73 2311,2997.73 2337.8,2970.83 C13.2
pads on no net: SW.1 SW.5 U4.4 U7.5 U7.6

## Polygon pours and split planes (outlines as drawn)
GND on Bottom Layer (solid): 1654.17,3564.56 1654.17,1654.72 1674.25,1634.64 3624.64,1634.64 3644.33,1654.33 3644.33,3454.33 3454.17,3644.48 1814.02,3644.48 1704.17,3534.64
GND on Top Layer (solid): 1625.83,3621.65 1625.83,1571.65 1697.48,1500 3518.74,1500 3590.39,1571.65 3590.39,3500 3504.56,3585.82 1697.48,3585.82 1683.31,3599.99 1675.83,3599.99

## Silkscreen, mask and mechanical layers (free items; w line width, h text height)
Top Overlay:
  circle w19.68: c1965.59,3178.73 r10
  text "G" at 2505.16,3303.03 h19.68 r270
  text "G" at 2615.16,3303.03 h19.68 r270
  text "G" at 2715.16,3303.03 h19.68 r270
  text "MI" at 2429.84,3298.03 h19.68 r90
  text "RX" at 2234.84,3288.03 h19.68 r90
  text "D+" at 2834.84,3283.03 h19.68 r90
  text "D-" at 2929.84,3283.03 h19.68 r90
  text "SCK" at 2329.84,3268.03 h19.68 r90
  text "MOSI" at 2134.84,3258.03 h19.68 r90
  text "VUSB" at 3029.84,3248.03 h19.68 r90
  text "MICRO" at 1984.03,3066.6 h35.43 r45
  text "D1" at 1845,3023.19 h19.68
  text "VIN" at 3240,3023.19 h19.68
  text "G" at 3265,2947.87 h19.68 r180
  text "D0" at 1845,2928.19 h19.68
  text "RS" at 1845,2828.19 h19.68
  text "RST" at 3235,2823.19 h19.68
  text "G" at 1845,2747.87 h19.68 r180
  text "5V" at 3250,2728.19 h19.68
  text "NC" at 3250,2633.19 h19.68
  text "D2" at 1845,2628.19 h19.68
  text "D3" at 1845,2523.19 h19.68
  text "NC" at 3250,2523.19 h19.68
  text "D4" at 1845,2428.19 h19.68
  text "A5" at 3250,2428.19 h19.68
  text "D5" at 1845,2328.19 h19.68
  text "A4" at 3250,2328.19 h19.68
  text "D6" at 1845,2228.19 h19.68
  text "A3" at 3250,2228.19 h19.68
  text "D7" at 1845,2128.19 h19.68
  text "A2" at 3250,2128.19 h19.68
  text "I8" at 2125,1892.87 h19.68 r180
  text "I9" at 2225,1892.87 h19.68 r180
  text "I10" at 2334.84,1883.03 h19.68 r90
  text "I11" at 2439.84,1883.03 h19.68 r90
  text "I12" at 2534.84,1883.03 h19.68 r90
  text "I13" at 2634.84,1883.03 h19.68 r90
  text "3V" at 2734.84,1878.03 h19.68 r90
  text "REF" at 2839.84,1878.03 h19.68 r90
  text "A0" at 2934.84,1878.03 h19.68 r90
  text "A1" at 3029.84,1878.03 h19.68 r90
Bottom Overlay:
  rectangle: 2351.42,2988.97 2640.39,3070.47
  text "Q.C." at 2862.44,2945.43 h80
  text "MICRO V1.0" at 2823.14,2194.64 h80